# EAGLE board UltrasonicSensorArray1 (EAGLE 9.5.2)

Size 100 x 80 mm. Coordinates in mm from the lower left corner, seen from the top.
Outline: 0,0 100,0 100,80 0,80 0,0
Copper layers (1*16): Top 0.035mm / dielectric 1.5mm / Bottom 0.035mm
Design rules "default": minimum track width 6mil, minimum drill 0.35mm, track to track 6mil, track to pad 6mil, pad to pad 6mil, via to via 6mil, smd to smd 6mil, copper to edge 40mil, drill to drill 6mil, minimum pad ring 10mil, minimum via ring 8mil, stop-mask expansion 4mil, vias tented up to drill 0mil, thermal gap 10mil

## Footprints (pad centres in the part's own frame; a part is rotated, then mirrored left to right if it is on the bottom)
C0603K = smd 1.05 x 1.08: 1 -0.875,0; 2 0.875,0
DIL14 = drill 0.813 long: 1 -7.62,-3.81; 2 -5.08,-3.81; 3 -2.54,-3.81; 4 0,-3.81; 5 2.54,-3.81; 6 5.08,-3.81; 7 7.62,-3.81; 8 7.62,3.81; 9 5.08,3.81; 10 2.54,3.81; 11 0,3.81; 12 -2.54,3.81; 13 -5.08,3.81; 14 -7.62,3.81
R0603 = smd 1 x 1.1: 1 -0.85,0; 2 0.85,0
PT-10 = drill 1.016 pad 1.778 octagon: 1 -2.54,-5.08; 2 2.54,-5.08; 3 0,5.08
0207/7 = drill 0.813 octagon: 1 -3.81,0; 2 3.81,0

## Placement (x,y rotation side)
C1  0.1u  [C0603K]  -26.67,16.51 0 top  (outside the outline)
C2  0.1u  [C0603K]  -30.48,16.51 0 top  (outside the outline)
C3  1000p  [C0603K]  -44,-3 0 top  (outside the outline)
C4  1000p  [C0603K]  -44,-7 0 top  (outside the outline)
C5  1000p  [C0603K]  -44,-11 0 top  (outside the outline)
C6  1000p  [C0603K]  -44,-15 0 top  (outside the outline)
IC1  OP400P  [DIL14]  -22.86,6.35 0 top  (outside the outline)
R1  10k  [R0603]  -15.24,12.7 0 top  (outside the outline)
R2  1M  [R0603]  -19.05,12.7 0 top  (outside the outline)
R3  10k  [R0603]  -22.86,12.7 0 top  (outside the outline)
R4  10k  [R0603]  -26.67,12.7 0 top  (outside the outline)
R5  10k  [R0603]  -30.48,12.7 0 top  (outside the outline)
R6  10k  [R0603]  -15.24,16.51 0 top  (outside the outline)
R7  10k  [R0603]  -19.05,16.51 0 top  (outside the outline)
R8  10k  [R0603]  -22.86,16.51 0 top  (outside the outline)
R9  500k  [PT-10]  -40,9 0 top  (outside the outline)
R10  15k  [R0603]  -44,-20 0 top  (outside the outline)
R11  15k  [R0603]  -44,-24 0 top  (outside the outline)
R12  330  [R0603]  -44,-28 0 top  (outside the outline)
R13  330  [R0603]  -44,-32 0 top  (outside the outline)
R14  39k  [0207/7]  -40,-37 0 top  (outside the outline)
R15  47k  [0207/7]  -40,-42 0 top  (outside the outline)

## Library data of the parts
C1-C6 = rcl; SPICEPREFIX: C
IC1 = linear
R1-R8 R10-R15 = rcl; SPICEPREFIX: R
R9 = rcl; SPICEMODEL: POT; SPICEPREFIX: X

## Nets
AGND: IC1.11 R5.1 R12.1 R13.1
N$1: IC1.2 R1.2 R2.1
N$2: IC1.3 R3.2
N$3: IC1.1 R2.2 R10.1
N$4: IC1.13 R7.2 R8.1
N$5: IC1.5 IC1.10 R3.1 R4.1 R5.2 R6.1
N$7: IC1.12 R6.2
N$8: C1.2 R1.1
N$9: C2.2 R7.1
N$10: R8.2 R9.1
N$11: IC1.14 R9.3
N$12: C2.1 C3.2 IC1.8 R15.2
N$13: C5.2 IC1.6 R14.1
N$14: C4.2 IC1.9 R15.1
N$15: C3.1 C4.1 R11.2 R13.2
N$16: C6.2 IC1.7 R11.1 R14.2
N$17: C5.1 C6.1 R10.2 R12.2
VCC: IC1.4 R4.2

## Tracks (layer width: path | path; a pad name or v marks a point on that pad's centre or on a via)
AGND  (3 unrouted)
N$1  (2 unrouted)
N$2  (1 unrouted)
N$3  (2 unrouted)
N$4  (2 unrouted)
N$5  (5 unrouted)
N$7  (1 unrouted)
N$8  (1 unrouted)
N$9  (1 unrouted)
N$10  (1 unrouted)
N$11  (1 unrouted)
N$12  (3 unrouted)
N$13  (2 unrouted)
N$14  (2 unrouted)
N$15  (3 unrouted)
N$16  (3 unrouted)
N$17  (3 unrouted)
VCC  (1 unrouted)